# EAGLE board sr_controller_v1 (EAGLE 7.4.0)

Size 150 x 110 mm. Coordinates in mm from the lower left corner, seen from the top.
Outline: 0,3 arc90 3,0 147,0 arc90 150,3 150,107 arc90 147,110 7,110 7,85.75 0,85.75 0,3
Copper layers (1*16): Top 0.035mm / dielectric 1.5mm / Bottom 0.035mm
Design rules "ITEADstudio_DRC": minimum track width 6mil, minimum drill 12mil, track to track 6mil, track to pad 6mil, pad to pad 6mil, via to via 6mil, smd to smd 0mil, copper to edge 10mil, drill to drill 10mil, minimum pad ring 10mil, minimum via ring 6mil, stop-mask expansion 2mil, vias tented up to drill 100mil, thermal gap 10mil
Holes 3 mm at 3.5,3.5 10.25,107 146,107 146,3.5

## Footprints (pad centres in the part's own frame; a part is rotated, then mirrored left to right if it is on the bottom)
BATTCOM_20MM_PTH = drill 1.3: 1 11.85,0; 2 -8.15,0
AK300/2 = drill 1.321 long: 1 -2.515,0; 2 2.489,0
C0805 = smd 1.3 x 1.5: 1 -0.85,0; 2 0.85,0
C0805K = smd 1.3 x 1.6: 1 -1,0; 2 1,0
153CLV-0605 = smd 3.5 x 1.6: + 2.7,0; - -2.7,0
DO41Z10 = drill 1.118: A 5.08,0; C -5.08,0
SOT363 = smd 0.5 x 0.5: 1 -0.75,-0.9; 3 0.75,-0.9; 4 0.75,0.9; 6 -0.75,0.9 | smd 0.4 x 0.5: 2 0,-0.9; 5 0,0.9
FUSE1 = drill 1.194 long: 1A -10.16,0; 1B -5.08,0; 2A 10.16,0; 2B 5.08,0
SIM900_SMT = smd 2 x 0.6: P$1 -12.4,8; P$2 -12.4,7; P$3 -12.4,6; P$4 -12.4,5; P$5 -12.4,4; P$6 -12.4,3; P$7 -12.4,2; P$8 -12.4,1; P$9 -12.4,0; P$10 -12.4,-1; P$11 -12.4,-2; P$12 -12.4,-3; P$13 -12.4,-4; P$14 -12.4,-5; P$15 -12.4,-6; P$16 -12.4,-7; P$17 -12.4,-8; P$35 12.4,-8; P$36 12.4,-7; P$37 12.4,-6; P$38 12.4,-5; P$39 12.4,-4; P$40 12.4,-3; P$41 12.4,-2; P$42 12.4,-1; P$43 12.4,0; P$44 12.4,1; P$45 12.4,2; P$46 12.4,3; P$47 12.4,4; P$48 12.4,5; P$49 12.4,6; P$50 12.4,7; P$51 12.4,8 | smd 0.6 x 2: P$18 -8,-12.4; P$19 -7,-12.4; P$20 -6,-12.4; P$21 -5,-12.4; P$22 -4,-12.4; P$23 -3,-12.4; P$24 -2,-12.4; P$25 -1,-12.4; P$26 0,-12.4; P$27 1,-12.4; P$28 2,-12.4; P$29 3,-12.4; P$30 4,-12.4; P$31 5,-12.4; P$32 6,-12.4; P$33 7,-12.4; P$34 8,-12.4; P$52 8,12.4; P$53 7,12.4; P$54 6,12.4; P$55 5,12.4; P$56 4,12.4; P$57 3,12.4; P$58 2,12.4; P$59 1,12.4; P$60 0,12.4; P$61 -1,12.4; P$62 -2,12.4; P$63 -3,12.4; P$64 -4,12.4; P$65 -5,12.4; P$66 -6,12.4; P$67 -7,12.4; P$68 -8,12.4
SIMHOLDER = smd 2 x 1.2: C1 -12.61,-3.81; C2 -12.61,-1.27; C3 -12.61,1.27; C5 12.61,-3.81; C6 12.61,-1.27; C7 12.61,1.27
CHIPLED_0805 = smd 1.2 x 1.2: A 0,-1.05; C 0,1.05
AK300/7 = drill 1.321 long: 1 -15.011,0; 2 -10.008,0; 3 -5.004,0; 4 0,0; 5 5.004,0; 6 10.008,0; 7 15.011,0
RASPBERRY_PI_B+ = drill 1.016 octagon: 1 8.37,51.23; 2 8.37,53.77; 3 10.91,51.23; 4 10.91,53.77; 5 13.45,51.23; 6 13.45,53.77; 7 15.99,51.23; 8 15.99,53.77; 9 18.53,51.23; 10 18.53,53.77; 11 21.07,51.23; 12 21.07,53.77; 13 23.61,51.23; 14 23.61,53.77; 15 26.15,51.23; 16 26.15,53.77; 17 28.69,51.23; 18 28.69,53.77; 19 31.23,51.23; 20 31.23,53.77; 21 33.77,51.23; 22 33.77,53.77; 23 36.31,51.23; 24 36.31,53.77; 25 38.85,51.23; 26 38.85,53.77; 27 41.39,51.23; 28 41.39,53.77; 29 43.93,51.23; 30 43.93,53.77; 31 46.47,51.23; 32 46.47,53.77; 33 49.01,51.23; 34 49.01,53.77; 35 51.55,51.23; 36 51.55,53.77; 37 54.09,51.23; 38 54.09,53.77; 39 56.63,51.23; 40 56.63,53.77 | drill 2.75 pad 6.2: PE_BL 3.5,3.5; PE_BR 61.5,3.5; PE_TL 3.5,52.5; PE_TR 61.5,52.5
TC38H = drill 0.813: 1 -1.27,0; 2 1.27,0
TO220BV = drill 1.016 long: D 0,-2.54; G -2.54,-2.54; S 2.54,-2.54
R0805 = smd 1.3 x 1.5: 1 -0.85,0; 2 0.85,0
0309/10 = drill 0.813 octagon: 1 -5.08,0; 2 5.08,0
0309V = drill 0.813 octagon: 1 -1.27,0; 2 1.27,0
SOLDERJUMPER_ARROW_NOPASTE = smd 0.762 x 1.524: 1 -1.016,0; 2 1.016,0
SOT23-BEC = smd 1 x 1.4: B -0.95,-1.1; C 0,1.1; E 0.95,-1.1
SOIC8_150MIL = smd 0.6 x 2.2: 1 -1.905,-2.6; 2 -0.635,-2.6; 3 0.635,-2.6; 4 1.905,-2.6; 5 1.905,2.6; 6 0.635,2.6; 7 -0.635,2.6; 8 -1.905,2.6
RHT03_DHT-22 = drill 0.8: DATA -1.27,0; GND 3.81,0; NULL 1.27,0 | drill 0.8 octagon: VDD -3.81,0
ARDUINO_PRO_MINI = drill 1.016 pad 1.88: 1 -7.62,12.7; 2 -7.62,10.16; 3 -7.62,7.62; 4 -7.62,5.08; 5 -7.62,2.54; 6 -7.62,0; 7 -7.62,-2.54; 8 -7.62,-5.08; 9 -7.62,-7.62; 10 -7.62,-10.16; 11 -7.62,-12.7; 12 -7.62,-15.24; 13 7.62,-15.24; 14 7.62,-12.7; 15 7.62,-10.16; 16 7.62,-7.62; 17 7.62,-5.08; 18 7.62,-2.54; 19 7.62,0; 20 7.62,2.54; 21 7.62,5.08; 22 7.62,7.62; 23 7.62,10.16; 24 7.62,12.7; 25 -1.27,-15.24; 26 -3.81,-15.24; 27 3.81,-15.24; 28 1.27,-15.24
SO08 = smd 0.61 x 2.21: 1 -1.905,-2.616; 2 -0.635,-2.616; 3 0.635,-2.616; 4 1.905,-2.616; 5 1.905,2.616; 6 0.635,2.616; 7 -0.635,2.616; 8 -1.905,2.616
GND_CONNECT = smd 1.016 x 1.016: 1 -1.016,0; 2 -1.016,-1.27; 3 0.254,-0.635
L0603 = smd 1.1 x 1: 1 -0.85,0; 2 0.85,0
DCDCMODULE-SMALL = drill 1.2 pad 2.184: INM#1 1.8,15; INM#2 1.8,12.5; OUTM#1 20.3,15; OUTM#2 20.3,12.5 | drill 1.2 pad 2.184 square: INP#1 1.8,4.3; INP#2 1.8,1.8; OUTP#1 20.3,4.3; OUTP#2 20.3,1.8
SO16 = smd 0.66 x 2.032: 1 -4.445,-3.073; 2 -3.175,-3.073; 3 -1.905,-3.073; 4 -0.635,-3.073; 5 0.635,-3.073; 6 1.905,-3.073; 7 3.175,-3.073; 8 4.445,-3.073; 9 4.445,3.073; 10 3.175,3.073; 11 1.905,3.073; 12 0.635,3.073; 13 -0.635,3.073; 14 -1.905,3.073; 15 -3.175,3.073; 16 -4.445,3.073
TV16 = drill 1 pad 1.93: IA -5.08,-6.35; IB -5.08,6.35; OA 5.08,6.35; OB 5.08,-6.35
SMA90_DIP = drill 1.5 pad 2.54: ANTENNA 0,0 | drill 1.6 pad 2.54: GND1 -2.54,2.54; GND2 2.54,2.54; GND3 -2.54,-2.54; GND4 2.54,-2.54

## Placement (x,y rotation side)
BAT1  [BATTCOM_20MM_PTH]  75.5,23 0 bottom
BI_REG_A  [AK300/2]  91,102 180 top
BI_REG_B  [AK300/2]  81,102 180 top
BI_SPLY_A  [AK300/2]  9,11.5 270 top
BI_SPLY_B  [AK300/2]  9,21.5 270 top
C1  C4.7uF  [C0805]  79.5,15.5 270 bottom
C3  C100N  [C0805K]  27.25,78 0 bottom
C4  C1N  [C0805K]  27.25,80.75 0 bottom
C5  C100N  [C0805K]  27.25,72 0 bottom
C6  C1N  [C0805K]  27.25,75 0 bottom
C7  C100uF  [153CLV-0605]  103.5,31 270 bottom
C8  C100uF  [153CLV-0605]  110.5,31 270 bottom
C9  C4.7uF  [C0805]  126,21.5 270 bottom
C10  C100nF  [C0805]  142,27 270 bottom
C11  C22pF  [C0805]  142,31 90 bottom
C12  C100nF  [C0805]  133,27 270 bottom
C13  C22pF  [C0805]  133,31 90 bottom
C14  C100N  [C0805K]  48,98 90 top
D2  18V  [DO41Z10]  23.5,91 90 bottom
D3  [SOT363]  137.5,26.5 90 bottom
DUMMY_A  [AK300/2]  9,43 270 top
DUMMY_B  [AK300/2]  9,48 270 top
DUMMY_C  [AK300/2]  9,58 270 top
DUMMY_D  [AK300/2]  9,68 270 top
F1  [FUSE1]  61.5,89.5 0 top
F2  [FUSE1]  86,89.5 0 top
F3  [FUSE1]  110,89.5 0 top
IC1  [SIM900_SMT]  113.5,22 90 top
J1  [SIMHOLDER]  137.5,22 270 top
LED1  [CHIPLED_0805]  93.5,20.75 0 top
LED2  [CHIPLED_0805]  93.5,28.75 180 top
MDM_REG_A  [AK300/2]  67,102 180 top
MDM_REG_B  [AK300/2]  57,102 180 top
MDM_SPLY  [AK300/7]  9,55.5 270 top
PCB1  RASPBERRY_PI_B+  [RASPBERRY_PI_B+]  87,59 180 top
Q1  32kHz  [TC38H]  75.5,20.5 0 top
Q3  IRF5210  [TO220BV]  40.25,76.25 270 top
R1  R10K  [R0805]  138.25,85.75 90 bottom
R2  R10K  [R0805]  93.5,48 180 bottom
R3  R2K  [R0805]  97.5,48 180 bottom
R4  R10K  [R0805]  93.5,46 180 bottom
R5  R10K  [R0805]  24,91 90 bottom
R6  R1K  [R0805]  21.75,71.75 180 top
R7  R10K  [R0805]  18.75,80 90 top
R8  R1K  [R0805]  20.75,80 270 top
R9  R20K  [R0805]  18.75,73.75 90 top
R10  R10K  [R0805]  93.5,54 180 bottom
R11  R2K  [R0805]  97.5,54 180 bottom
R12  R10K  [R0805]  93.5,52 180 bottom
R13  R1K  [R0805]  97.5,52 180 bottom
R14  R10K  [R0805]  93.5,50 180 bottom
R15  R2K  [R0805]  97.5,50 180 bottom
R16  R10K  [R0805]  93.5,42 180 bottom
R17  R5K  [R0805]  97.5,42 180 bottom
R18  R22R  [R0805]  136,31 90 bottom
R19  R22R  [R0805]  139,31 90 bottom
R20  R22R  [R0805]  137.5,23 90 bottom
R21  R1K  [R0805]  95.75,16.75 90 top
R22  R10K  [R0805]  97.75,16.75 270 top
R23  R1K  [R0805]  93.75,16.75 90 top
R24  R1K  [R0805]  97.5,32.75 270 top
R25  R10K  [R0805]  95.5,32.75 90 top
R26  R1K  [R0805]  93.5,32.75 270 top
R27  R120R  [R0805]  102,5 270 top
R28  R10K  [R0805]  93.5,44 180 bottom
R29  R2K  [R0805]  97.5,44 180 bottom
R30  R1K  [R0805]  117.5,72 270 top
R31  R2K  [R0805]  117.5,68 270 top
R32  R100K  [0309/10]  30,99 270 top
R33  R2K  [0309V]  48,103.5 90 top
R34  R2K  [R0805]  97.5,46 180 bottom
R35  R1K  [R0805]  126.25,50 0 top
R36  R1K  [R0805]  126.25,47.25 0 top
SCADA_REG_A  [AK300/2]  115,102 180 top
SCADA_REG_B  [AK300/2]  105,102 180 top
SCADA_SPLY  [AK300/2]  9,31.5 270 top
SJ1  [SOLDERJUMPER_ARROW_NOPASTE]  72.25,69.5 270 top
SJ2  [SOLDERJUMPER_ARROW_NOPASTE]  72.5,51.5 270 top
T1  [SOT23-BEC]  96,21 0 top
T2  [SOT23-BEC]  96,28.5 180 top
T3  [SOT23-BEC]  105,5 270 top
T4  [SOT23-BEC]  21.75,74.75 90 top
U1  [SOIC8_150MIL]  75.5,15.5 180 bottom
U3  [RHT03_DHT-22]  135.75,88.25 90 top
U$1  ARDUINO_PRO_MINI  [ARDUINO_PRO_MINI]  122,57.5 0 top
U$2  ACS712  [SO08]  21.25,79 90 bottom
U$3  GND_CONNECT  [GND_CONNECT]  40.25,82.75 270 top
U$4  ACS712  [SO08]  21.25,73.75 90 bottom
U$5  FB0603  [L0603]  107,26.5 180 bottom
U$6  DCDCMODULE_SMALL  [DCDCMODULE-SMALL]  55,66.75 0 top
U$7  DCDCMODULE_SMALL  [DCDCMODULE-SMALL]  55,48.5 0 top
U$8  74HC4053D  [SO16]  106,47.75 270 bottom
U$9  TRANSFORMER  [TV16]  37,99 0 top
U$10  DCDCMODULE_SMALL  [DCDCMODULE-SMALL]  52.75,65.25 180 top
U$11  DCDCMODULE_SMALL  [DCDCMODULE-SMALL]  52.75,30.25 180 top
U$13  DCDCMODULE_SMALL  [DCDCMODULE-SMALL]  52.75,47.75 180 top
V_ACCU  [AK300/2]  9,79.5 270 top
V_PWR_SPLY  [AK300/2]  19.5,91 270 top
VAC  [AK300/2]  19.5,102.5 270 top
X1  [SMA90_DIP]  94.5,6 180 top

## Library data of the parts
BAT1 = SparkFun-Electromechanical
BI_REG_A BI_REG_B BI_SPLY_A BI_SPLY_B DUMMY_A DUMMY_B DUMMY_C DUMMY_D MDM_REG_A MDM_REG_B MDM_SPLY SCADA_REG_A SCADA_REG_B SCADA_SPLY V_ACCU V_PWR_SPLY VAC = con-ptr500; OC_FARNELL: unknown; OC_NEWARK: unknown
C1 C3-C14 R1-R36 = resistor
D2 = diode
D3 IC1 U1 X1 = microbuilder
F1-F3 = special
J1 = SparkFun-Connectors; PROD_ID: CONN-08536
LED1 LED2 = adafruit
PCB1 = RASPBERRY_PI_Bplus
Q1 = crystal; OC_FARNELL: unknown; OC_NEWARK: unknown
Q3 = transistor-power
SJ1 SJ2 = microbuilder; BOM: EXCLUDE
T1-T4 = transistor
U3 = RHT03_DHT-22_AM2302; PROD_ID: SEN-10167
U$1 U$5 U$8 = tigorcustom
U$2 U$4 = SparkFun-AnalogIC
U$3 = SparkFun-Passives
U$6 U$7 U$9-U$11 U$13 = bontor

## Nets
+3V3: R23.1 R26.1 SJ2.2 U$5.2
+5V: C1.2 C3.2 C5.2 PCB1.2 PCB1.4 R1.1 R35.1 R36.1 SJ1.2 U1.8 U3.VDD U$1.21 U$2.8 U$4.8 U$8.16
+6.5V: MDM_SPLY.6 R14.1 U$13.OUTP#1 U$13.OUTP#2
+13.5V: MDM_SPLY.2 R28.1 U$10.OUTP#1 U$10.OUTP#2
+19.5V: MDM_SPLY.7 R2.1 U$11.OUTP#1 U$11.OUTP#2
AGND: C3.1 C4.1 C5.1 C6.1 C14.1 U$2.5 U$3.2 U$4.5
ARDU_RX: PCB1.35 U$1.2
ARDU_TX: PCB1.37 R30.2 R31.1
CTRL_CHARGING: PCB1.11 R6.1
CTRL_SIM_PWRKEY: PCB1.15 R27.1
DHT_DATA: R1.2 U3.DATA U$1.13
GND: BAT1.2 BI_REG_A.2 BI_REG_B.1 BI_SPLY_A.2 BI_SPLY_B.2 C1.1 C7.- C8.- C9.1 C10.1 C11.1 C12.1 C13.1 D3.2 IC1.P$17 IC1.P$18 IC1.P$29 IC1.P$39 IC1.P$45 IC1.P$46 IC1.P$53 IC1.P$54 IC1.P$58 IC1.P$59 IC1.P$61 IC1.P$62 IC1.P$63 IC1.P$64 IC1.P$65 J1.C5 MDM_REG_A.2 MDM_REG_B.1 MDM_SPLY.4 PCB1.6 PCB1.9 PCB1.14 PCB1.20 PCB1.25 PCB1.30 PCB1.34 PCB1.39 R3.2 R8.2 R11.2 R13.2 R15.2 R17.2 R22.1 R25.1 R29.2 R31.2 R34.2 SCADA_REG_A.2 SCADA_REG_B.1 SCADA_SPLY.2 T1.E T2.E T3.E T4.E U1.4 U3.GND U$1.4 U$1.23 U$3.1 U$6.INM#1 U$6.INM#2 U$6.OUTM#1 U$6.OUTM#2 U$7.INM#1 U$7.INM#2 U$7.OUTM#1 U$7.OUTM#2 U$8.6 U$8.7 U$8.8 U$10.INM#1 U$10.INM#2 U$10.OUTM#1 U$10.OUTM#2 U$11.INM#1 U$11.INM#2 U$11.OUTM#1 U$11.OUTM#2 U$13.INM#1 U$13.INM#2 U$13.OUTM#1 U$13.OUTM#2 V_ACCU.1 V_PWR_SPLY.1 X1.GND1 X1.GND2 X1.GND3 X1.GND4
GPIO11: IC1.P$67
GPIO12: IC1.P$68
MDM_INDC_0: MDM_SPLY.3 R36.2 U$1.15
MDM_INDC_1: MDM_SPLY.5 R35.2 U$1.16
N$1: R32.1 VAC.2
N$2: U$9.IB VAC.1
N$3: Q1.2 U1.1
N$4: Q1.1 U1.2
N$5: BAT1.1 U1.3
N$6: U$8.13 U$8.15
N$7: U$8.4 U$8.12
N$8: SJ1.1 U$6.OUTP#1 U$6.OUTP#2
N$9: SJ2.1 U$7.OUTP#1 U$7.OUTP#2
N$10: C4.2 U$2.6
N$11: D2.A Q3.G R5.2 R9.1
N$12: D2.C Q3.S R5.1 V_PWR_SPLY.2
N$13: R6.2 T4.B
N$14: R9.2 T4.C
N$15: Q3.D U$4.1 U$4.2
N$16: C6.2 U$4.6
N$17: F1.1A MDM_REG_B.2
N$18: BI_REG_B.2 F2.1A
N$19: F3.1A SCADA_REG_B.2
N$21: IC1.P$60 X1.ANTENNA
N$22: C7.+ C8.+ IC1.P$55 IC1.P$56 IC1.P$57 U$5.1
N$23: C9.2 IC1.P$26
N$24: IC1.P$33 R18.1
N$25: IC1.P$32 R19.1
N$26: IC1.P$31 R20.1
N$27: LED1.C T1.C
N$28: LED1.A R23.2
N$29: LED2.C T2.C
N$30: R21.2 R22.2 T1.B
N$31: LED2.A R26.2
N$32: R24.2 R25.2 T2.B
N$33: R27.2 T3.B
N$35: R30.1 U$1.1
N$36: R32.2 U$9.IA
N$38: C14.2 R33.1 U$9.OB
RTC_SCL: PCB1.5 U1.6
RTC_SDA: PCB1.3 U1.5
SEL_SENSOR_1: U$1.9 U$8.11
SEL_SENSOR_2: U$1.10 U$8.10
SEL_SENSOR_3: U$1.11 U$8.9
SENSOR_BUC: R12.2 R13.1 U$1.28
SENSOR_IBAT: U$1.19 U$4.7
SENSOR_ILOAD: U$1.20 U$2.7
SENSOR_MDM: U$1.26 U$8.14
SENSOR_MDM_0: R14.2 R15.1 U$8.2
SENSOR_MDM_1: R28.2 R29.1 U$8.1
SENSOR_MDM_2: R2.2 R3.1 U$8.5
SENSOR_MDM_3: R4.2 R34.1 U$8.3
SENSOR_SCADA: R16.2 R17.1 U$1.25
SENSOR_SCPC: R10.2 R11.1 U$1.27
SENSOR_VAC: R33.2 U$1.17 U$9.OA
SENSOR_VBAT: R7.2 R8.1 U$1.18
SIM_NETLIGHT: IC1.P$52 R24.1
SIM_PWRKEY: IC1.P$1 T3.C
SIM_RX: IC1.P$10 PCB1.8
SIM_STATUS: IC1.P$66 R21.1
SIM_TX: IC1.P$9 PCB1.10
USIM_CLK: D3.4 J1.C3 R19.2
USIM_DATA: D3.1 J1.C7 R20.2
USIM_RST: D3.3 J1.C2 R18.2
USIM_VDD: C10.2 C11.2 C12.2 C13.2 D3.5 IC1.P$30 J1.C1
VBAT: R7.1 U$2.1 U$2.2 U$4.3 U$4.4 V_ACCU.2
VLOAD: BI_SPLY_A.1 F1.2A F2.2A F3.2A R12.1 U$2.3 U$2.4
VMDM: MDM_REG_A.1 MDM_SPLY.1 R4.1 U$6.INP#1 U$6.INP#2 U$7.INP#1 U$7.INP#2 U$10.INP#1 U$10.INP#2 U$11.INP#1 U$11.INP#2 U$13.INP#1 U$13.INP#2
VSCADA: R16.1 SCADA_REG_A.1 SCADA_SPLY.1
VSCPC: BI_REG_A.1 BI_SPLY_B.1 R10.1

## Tracks (layer width: path | path; a pad name or v marks a point on that pad's centre or on a via)
+3V3  (3 unrouted)
+5V  (14 unrouted)
+6.5V  (3 unrouted)
+13.5V  (3 unrouted)
+19.5V  (3 unrouted)
AGND  (7 unrouted)
ARDU_RX  (1 unrouted)
ARDU_TX  (2 unrouted)
CTRL_CHARGING  (1 unrouted)
CTRL_SIM_PWRKEY  (1 unrouted)
DHT_DATA  (2 unrouted)
GND  (92 unrouted)
MDM_INDC_0  (2 unrouted)
MDM_INDC_1  (2 unrouted)
N$1  (1 unrouted)
N$2  (1 unrouted)
N$3  (1 unrouted)
N$4  (1 unrouted)
N$5  (1 unrouted)
N$6  (1 unrouted)
N$7  (1 unrouted)
N$8  (2 unrouted)
N$9  (2 unrouted)
N$10  (1 unrouted)
N$11  (3 unrouted)
N$12  (3 unrouted)
N$13  (1 unrouted)
N$14  (1 unrouted)
N$15  (2 unrouted)
N$16  (1 unrouted)
N$17  (1 unrouted)
N$18  (1 unrouted)
N$19  (1 unrouted)
N$21  (1 unrouted)
N$22  (5 unrouted)
N$23  (1 unrouted)
N$24  (1 unrouted)
N$25  (1 unrouted)
N$26  (1 unrouted)
N$27  (1 unrouted)
N$28  (1 unrouted)
N$29  (1 unrouted)
N$30  (2 unrouted)
N$31  (1 unrouted)
N$32  (2 unrouted)
N$33  (1 unrouted)
N$35  (1 unrouted)
N$36  (1 unrouted)
N$38  (2 unrouted)
RTC_SCL  (1 unrouted)
RTC_SDA  (1 unrouted)
SEL_SENSOR_1  (1 unrouted)
SEL_SENSOR_2  (1 unrouted)
SEL_SENSOR_3  (1 unrouted)
SENSOR_BUC  (2 unrouted)
SENSOR_IBAT  (1 unrouted)
SENSOR_ILOAD  (1 unrouted)
SENSOR_MDM  (1 unrouted)
SENSOR_MDM_0  (2 unrouted)
SENSOR_MDM_1  (2 unrouted)
SENSOR_MDM_2  (2 unrouted)
SENSOR_MDM_3  (2 unrouted)
SENSOR_SCADA  (2 unrouted)
SENSOR_SCPC  (2 unrouted)
SENSOR_VAC  (2 unrouted)
SENSOR_VBAT  (2 unrouted)
SIM_NETLIGHT  (1 unrouted)
SIM_PWRKEY  (1 unrouted)
SIM_RX  (1 unrouted)
SIM_STATUS  (1 unrouted)
SIM_TX  (1 unrouted)
USIM_CLK  (2 unrouted)
USIM_DATA  (2 unrouted)
USIM_RST  (2 unrouted)
USIM_VDD  (6 unrouted)
VBAT  (5 unrouted)
VLOAD  (6 unrouted)
VMDM  (12 unrouted)
VSCADA  (2 unrouted)
VSCPC  (2 unrouted)